# Altium PCB moteus_n1.PcbDoc (part 2 of 2)
Units mm, origin at the board's own origin, x right, y up, seen from the top; angles counter-clockwise.
Board outline 46 x 46 mm, 4 copper layers (Top, Route2, Route15, Bottom), stack 1.69 mm thick; 192 components, 104 nets, 644 pads, 479 vias.
Unrouted connection lines stored in the file: 50.
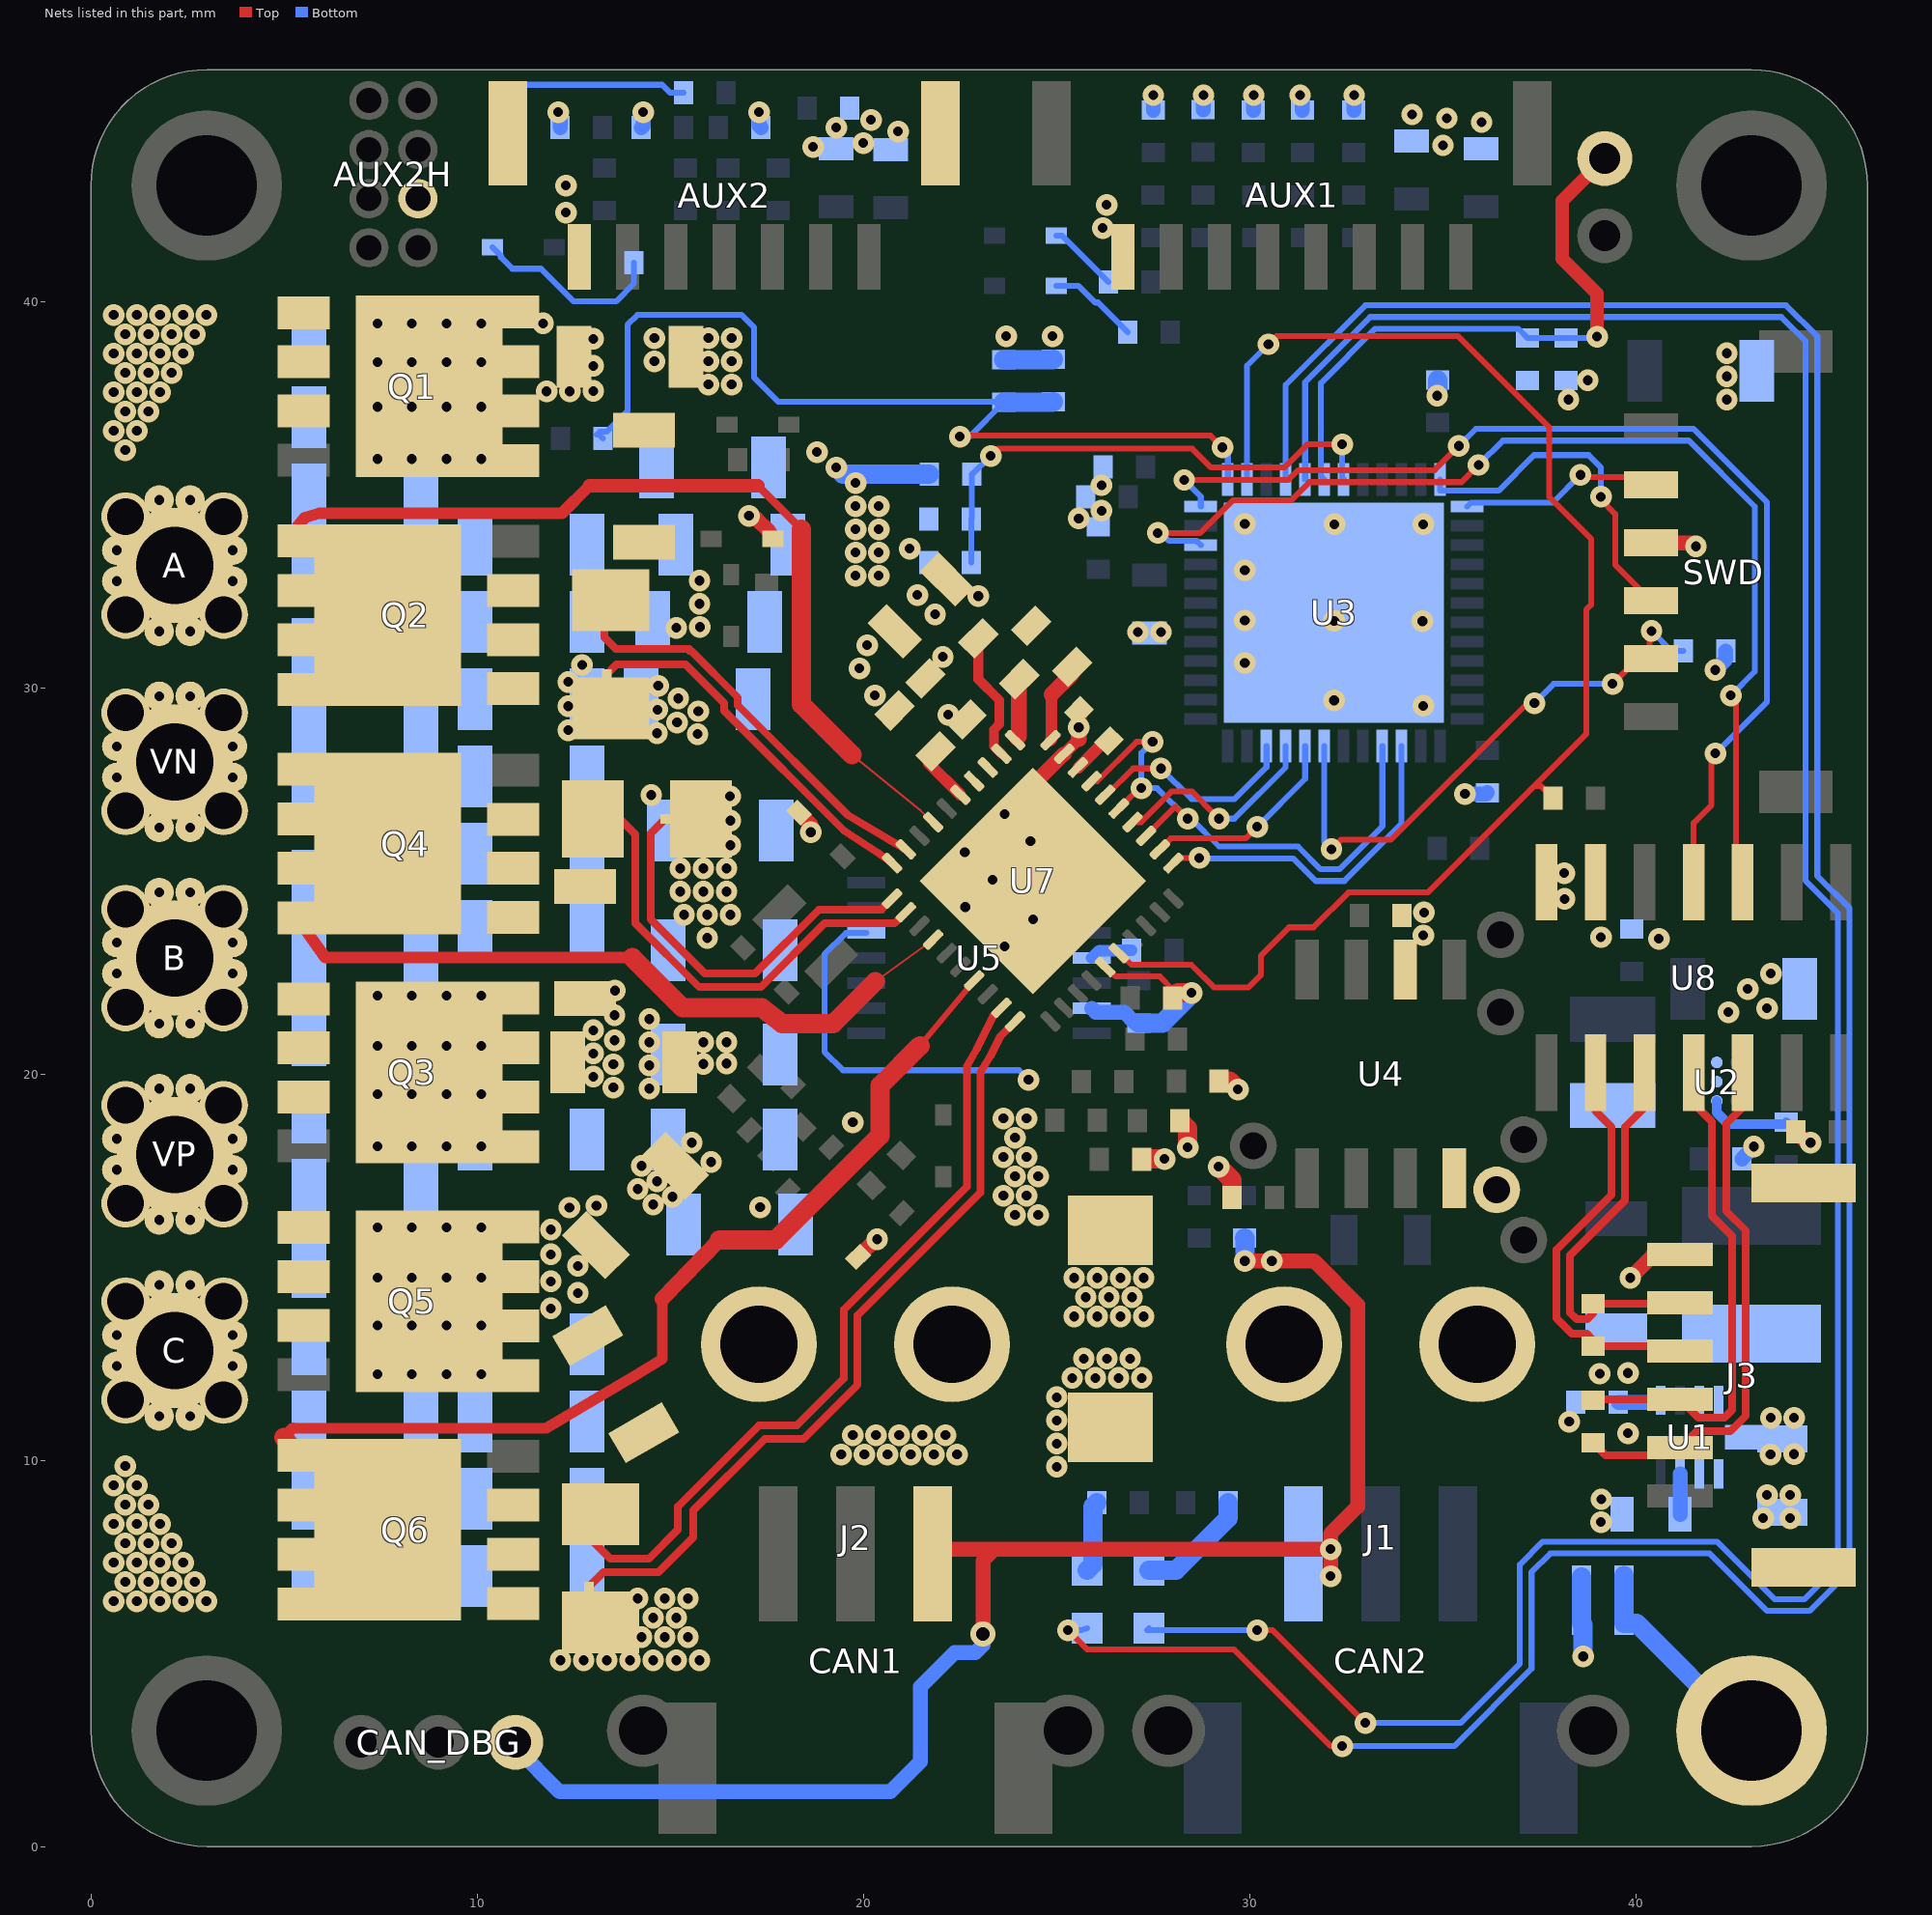
[diagram p4: the nets of this part, all layers, seen from the top]

## Via types
v1: diameter 0.559/0.559/0.559/0.559 (per signal layer), hole 0.254, Top to Bottom, 469 vias
v2: diameter 0.655/0.655/0.655/0.655 (per signal layer), hole 0.35, Top to Bottom, 10 vias

## Nets (pads, with @x,y where several pads share a name; then routed paths per layer and width w, separated by ;. In a path a pad name is that pad's centre, name@x,y a point inside that pad or via, vN(x,y) a via of type N, cw(c..) or ccw(c..) an arc to the next point about the centre after c; other vN are vias at no path point) (continued)
GND: AUX1.8 AUX2.7 AUX2H.P$6 C3.P$2 C4.P$2 C5.P$2 C6.P$2 C7.P$2 C8.P$2 C9.P$2 C10.P$2 C11.P$2 C12.P$2 C13.P$1 C14.P$2 C15.P$2 C16.P$2 C17.P$2 C18.P$2 C19.P$2 C20.P$2 C21.P$2 C22.P$2 C23.P$2 C23\.P$2 C24.P$2 C25.P$2 C26.P$2 C27.P$2 C28.P$2 C29.P$2 C30.P$2 C31.P$2 C32.P$2 C33.P$2 C34.P$2 C35.P$2 C36.P$2 C42.P$1 C87.P$2 CAN1.3 CAN2.3 CAN_DBG.3 DG1.P$1 J3.6 R3.P$1 R16.P$1 R18.P$2 R19.P$2 R38.P$1 SH4.2 SWD.4 U1.7 U2.B1 U2.B2 U3.49 U4.2 U4.8 U5.5 U5.13 U7.25 U8.6 U8.7 | length 67.9
  Top w0.152: U7.25@26.264,22.773 26.292,22.773 26.542,22.522 27.678,22.522 28.01,22.19 C42.P$1@28.01,21.96
  Top w0.384: CAN1.3@21.8,7.58 21.82,7.7 23.4,7.7 ; v2(23.1,5.5) 23.1,7.4 23.4,7.7 ; v1(29.88,15.16) v1(30.58,15.16) 31.668,15.16 32.8,14.028 32.8,8.8 32.1,8.1 v1(32.1,7.7) ; v1(32.1,7) v1(32.1,7.7) ; v1(39.86,14.72) 40.445,15.305 40.445,15.32 40.45,15.325 J3.6@41.15,15.325 ; SWD.4@40.4,33.75 41.47,33.75 v1(41.56,33.66) ; C30.P$2@44.15,18.5 44.43,18.22 v1(44.53,18.22) ; 23.4,7.7 v1(32.1,7.7)
  Top w0.5: C36.P$2@27.21,17.79 27.22,17.8 v1(27.8,17.8) ; C42.P$1@28.01,21.96 28.15,22.1 v1(28.5,22.1) ; C35.P$2@28.2,18.79 28.4,18.59 v1(28.4,18.1) ; v1(29.2,17.6) 29.55,17.25 C16.P$2@29.55,16.8 ; C34.P$2@29.21,19.81 29.49,19.81 v1(29.7,19.6)
  Bottom w0.152: U5.5@20.082,23.65 19.55,23.65 18.995,23.095 18.995,20.574 19.474,20.095 24.035,20.095 v1(24.28,19.85) ; v1(32.19,31.73) U3.49@32.19,31.94
  Bottom w0.384: CAN_DBG.3@11,2.7 11,2.561 12.14,1.421 20.7,1.421 21.479,2.2 21.479,4.14 22.36,5.021 22.9,5.021 23.1,5.221 v2(23.1,5.5) ; v1(12.1,44.9) 12.15,44.85 C19.P$2@12.15,44.5 ; C20.P$2@14.25,44.5 14.3,44.55 v1(14.3,44.9) ; v1(17.3,44.9) 17.3,44.55 C21.P$2@17.35,44.5 ; U5.13@25.918,21.7 26.018,21.6 26.76,21.6 27.04,21.32 C15.P$2@27.14,21.32 ; C25.P$2@27.51,44.95 v1(27.51,45.34) ; C26.P$2@28.8,44.96 28.8,45.33 v1(28.81,45.34) ; C27.P$2@30.1,44.95 30.1,45.33 v1(30.11,45.34) ; v1(31.31,45.34) 31.37,45.28 C28.P$2@31.37,44.95 ; C29.P$2@32.7,44.95 32.7,45.33 v1(32.71,45.34) ; v1(35.58,27.25) 36.13,27.25 C7.P$2@36.16,27.28 ; v1(42.06,30.46) 42.33,30.73 C9.P$2@42.33,30.95 ; C5.P$2@42.75,17.8 43.06,18.11 v1(43.06,18.12)
  Bottom w0.5: C32.P$2@23.64,38.49 24.91,38.49 R18.P$2@24.92,38.5 ; C15.P$2@27.14,21.32 27.75,21.32 28.5,22.07 v1(28.5,22.1) ; R3.P$1@29.87,15.75 29.88,15.74 v1(29.88,15.16) ; v1(34.86,37.56) 34.87,37.57 C8.P$2@34.87,37.97
  other v1: 39.1,8.4 39.11,8.99 39.8,10.7 38.28,11 39.07,12.24 39.8,12.26 42.4,21.6 43.4,21.7 42.9,22.2 43.5,22.6 40.6,23.5 39.1,23.54 34.5,23.59 34.52,24.18 38.16,24.53 38.15,25.2 34.5,29.53 32.19,29.67 29.88,30.64 27.11,31.44 27.71,31.44 34.48,31.72 29.88,31.74 29.88,33.04 21.2,33.6 29.88,34.24 32.2,34.23 34.5,34.23 25.58,34.38 26.17,34.58 26.17,35.24 38.26,37.46 42.36,37.46 38.76,37.96 42.36,38.06 42.36,38.66 23.7,39.1 24.9,39.1 26.2,41.9 12.3,42.3 26.3,42.5 12.3,43 18.7,44 35.01,44.04 20,44.1 20.9,44.4 19.3,44.5 36.01,44.64 20.2,44.7 35.11,44.74 34.21,44.84
LED1: D1.CATHODE U3.28 | length 76.3
  Top w0.152: v1(25.3,5.6) 25.8,5.1 29.6,5.1 32.1,2.6 v1(32.4,2.6)
  Bottom w0.152: v1(25.3,5.6) 25.65,5.6 D1.CATHODE@25.8,5.65 ; U3.28@30.94,35.39 30.94,37.84 33,39.9 43.896,39.9 44.705,39.091 44.705,25.126 45.539,24.292 45.539,7.139 44.5,6.1 43.4,6.1 41.913,7.587 37.787,7.587 37.305,7.105 37.305,4.605 35.3,2.6 v1(32.4,2.6)
LED2: D2.CATHODE U3.29 | length 71.9
  Top w0.152: v1(30.2,5.6) 30.6,5.6 v1(33,3.2)
  Bottom w0.152: D2.CATHODE@27.4,5.65 27.35,5.6 v1(30.2,5.6) ; U3.29@31.44,35.39 31.44,37.909 33.126,39.595 43.77,39.595 44.4,38.965 44.4,25 45.234,24.166 45.234,7.265 44.374,6.405 43.595,6.405 42.108,7.892 37.592,7.892 37,7.3 37,4.731 35.469,3.2 v1(33,3.2)
MOTOR1: U3.8 U7.32 | length 5.4
  Top w0.152: U7.32@27.678,25.813 27.965,26.1 29.9,26.1 v1(30.2,26.4)
  Bottom w0.152: v1(30.2,26.4) 31.44,27.64 U3.8@31.44,28.49
MOTOR2: U3.9 U7.34 | length 5.7
  Top w0.152: U7.34@26.971,26.52 27.194,26.52 27.99,27.316 28.51,27.316 28.808,27.018 28.808,27.011 v1(29.211,26.608)
  Bottom w0.152: v1(29.211,26.608) 29.608,26.608 30.94,27.94 U3.9@30.94,28.49
MOTOR3: U3.10 U7.36 | length 5.7
  Top w0.152: U7.36@26.264,27.227 26.309,27.227 26.99,27.908 v1(27.708,27.908)
  Bottom w0.152: v1(27.708,27.908) 28.5,27.116 29.614,27.116 30.44,27.942 U3.10@30.44,28.49
MOTOR_ENABLE: U3.3 U7.31 | length 8.8
  Top w0.152: U7.31@28.032,25.46 28.164,25.592 v1(28.7,25.592)
  Bottom w0.152: v1(28.7,25.592) 28.7,25.575 31.138,25.575 31.718,24.995 32.456,24.995 33.94,26.479 U3.3@33.94,28.49
MOTOR_FAULT: R26.P$2 U3.26 U7.26 | length 36.6
  Top w0.152: U7.26@26.617,23.126 26.646,23.126 26.945,22.827 28.495,22.827 29.087,22.235 29.966,22.235 30.3,22.569 30.3,23.069 31.026,23.795 31.657,23.795 32.562,24.7 34.62,24.7 37.37,27.45 ; v1(30.49,38.89) 30.7,39.1 35.4,39.1 37.757,36.743 37.757,34.943 38.845,33.855 38.845,32.145 38.72,32.019 38.72,28.8 37.37,27.45 ; R26.P$2@37.86,27.14 37.55,27.45 37.37,27.45
  Bottom w0.152: U3.26@29.94,35.39 29.94,38.34 v1(30.49,38.89)
MOTOR_HIZ: U3.4 U7.33 U7.35 U7.37 | length 15.3
  Top w0.152: U7.37@25.91,27.581 26.06,27.581 27.079,28.6 v1(27.49,28.6) ; U7.35@26.617,26.874 27.143,27.4 v1(27.2,27.4) ; U7.33@27.324,26.167 28.083,26.925 v1(28.4,26.608)
  Bottom w0.152: v1(27.49,28.6) 27.2,28.31 v1(27.2,27.4) 27.608,27.4 v1(28.4,26.608) 28.492,26.608 29.21,25.89 31.257,25.89 31.847,25.3 32.33,25.3 33.44,26.41 U3.4@33.44,28.49
N$1: C1.P$1 M3.P$1 R1.P$1 | length 5.7
  Bottom w0.5: R1.P$1@39.7,6.98 39.7,7.01 C1.P$1@39.7,5.78 40.02,5.78 42.8,3 M3.P$1@43,3
N$2: C40.P$2 U7.40 | length 2.1
  Top w0.254: C40.P$2@25.41,30.362 C40.P$2@25.41,30.54
  Top w0.305: U7.40@24.85,28.641 24.87,28.662 24.87,29.822
  Top w0.406: 24.87,29.822 C40.P$2@25.41,30.362
N$3: R40.P$1 U5.11 | length 1.1
  Bottom w0.305: U5.11@25.918,23 26.111,23.193 26.539,23.193 26.547,23.2 R40.P$1@26.95,23.2
N$4: C3.P$1 U1.3 | length 1
  Bottom w0.384: C3.P$1@41.15,8.6 U1.3@41.15,9.647
N$5: L2.2 U2.A1
N$10: C39.P$2 U7.1 | length 1.6
  Top w0.254: U7.1@23.93,28.641 24.03,28.742 ; C39.P$2@24.03,30.21 C39.P$2@24.04,30.22
  Top w0.406: 24.03,28.742 C39.P$2@24.03,30.21
N$13: C39.P$1 U7.2 | length 3.4
  Top w0.254: C39.P$1@22.98,31.28 22.98,30.22 23.524,29.676 23.524,29.055 23.384,28.914 23.384,28.481 U7.2@23.577,28.288
N$14: C38.P$2 U7.5 | length 1.5
  Top w0.152: C38.P$2@21.681,28.062 C38.P$2@21.87,28.35
  Top w0.3: C38.P$2@21.681,28.062 U7.5@22.516,27.227
N$16: C41.P$2 U7.38 | length 1.1
  Top w0.254: U7.38@25.557,27.934 U7.38@25.572,27.934 ; C41.P$2@26.259,28.621 C41.P$2@26.359,28.621
  Top w0.305: U7.38@25.572,27.934 C41.P$2@26.259,28.621
N$17: D1.ANODE R20.P$2 | length 1.9
  Bottom w0.5: D1.ANODE@25.8,7.15 25.95,7.3 25.95,8.8 R20.P$2@26.05,8.9
N$18: D2.ANODE R21.P$2 | length 3
  Bottom w0.5: D2.ANODE@27.4,7.15 28.1,7.15 29.45,8.5 R21.P$2@29.45,8.9
N$20: AUX2.S1
N$21: AUX2.S2
N$22: J3.S1
N$23: J3.S2
N$24: R38.P$2 U1.5 | length 1.1
  Bottom w0.384: R38.P$2@39.55,11.5 40.598,11.5 U1.5@40.65,11.552
N$25: D14.1 R34.P$1 | length 2.3
  Bottom w0.152: D14.1@25,40.4 25.577,40.4 26.005,39.971 26.079,39.971 R34.P$1@26.85,39.2
N$26: R39.P$1 U2.B3 | length 2.2
  Bottom w0.254: U2.B3@42.1,19.3 42.1,19 42.4,18.7 43.85,18.7 R39.P$1@43.9,18.75
N$27: D13.1 R33.P$1 | length 1.8
  Bottom w0.152: D13.1@25,41.7 25.15,41.7 R33.P$1@26.35,40.5
N$28: D15.1 R6.P$1 | length 4.7
  Bottom w0.152: D15.1@10.8,45.4 11.008,45.608 14.792,45.608 15,45.4 R6.P$1@15.35,45.4
N$29: D16.1 R7.P$1 | length 5
  Bottom w0.152: D16.1@10.4,41.4 10.617,41.183 10.617,41.144 10.915,40.846 11.654,40.846 12.5,40 13.6,40 14.06,40.46 R7.P$1@14.06,41
NRST: C9.P$1 SWD.2 U3.7 | length 14.9
  Top w0.152: v1(32.121,25.819) 32.362,26.06 33.657,26.06 37.197,29.6 v1(37.377,29.6) ; v1(39.4,30.1) 40.05,30.75 SWD.2@40.4,30.75 40.36,30.79 40.36,31.418 v1(40.41,31.468)
  Bottom w0.152: U3.7@31.94,28.49 31.94,26 v1(32.121,25.819) ; v1(37.377,29.6) 37.877,30.1 v1(39.4,30.1) ; v1(40.41,31.468) 40.929,30.95 C9.P$1@41.23,30.95
RS422_A: J3.2 R35.P$2 U8.12 | length 13.8
  Top w0.2: R35.P$2@38.9,10.45 39.225,10.125 40.95,10.125 J3.2@41.15,10.325 41.573,10.748 42.446,10.748 42.852,11.154 42.852,15.946 42.35,16.448 42.35,18.716 42.77,19.136 U8.12@42.77,20.036
RS422_B: J3.3 R35.P$1 U8.11 | length 13
  Top w0.2: R35.P$1@38.9,11.55 38.925,11.575 J3.3@41.15,11.575 41.625,11.1 42.3,11.1 42.5,11.3 42.5,15.8 41.97,16.33 41.97,18.766 41.5,19.236 U8.11@41.5,20.036
RS422_DE: U3.24 U8.4 | length 27.9
  Top w0.152: v1(28.309,35.378) 31.009,35.378 31.26,35.63 34.79,35.63 v1(35.419,36.259) ; U8.4@41.5,24.964 41.5,26.5 41.963,26.963 41.963,28.2 v1(42.063,28.3)
  Bottom w0.152: v1(28.309,35.378) 28.74,34.947 U3.24@28.74,34.69 ; v1(35.419,36.259) 35.86,36.7 41.5,36.7 43.4,34.8 43.4,29.637 v1(42.063,28.3)
RS422_RE: U3.22 U8.3 | length 28.5
  Top w0.152: v1(27.625,34.005) 28.725,34.005 29.57,34.851 31.081,34.851 31.551,35.32 35.486,35.32 v1(35.932,35.766) ; v1(42.463,29.8) 42.6,29.663 42.6,25.134 U8.3@42.77,24.964
  Bottom w0.152: v1(27.625,34.005) 27.715,34.005 27.921,33.8 28.63,33.8 U3.22@28.74,33.69 ; v1(35.932,35.766) 36.561,36.395 41.374,36.395 43.084,34.684 43.084,30.421 v1(42.463,29.8)
RS422_Y: J3.4 R36.P$2 U8.9 | length 10.8
  Top w0.2: U8.9@38.96,20.036 38.96,19.04 39.37,18.63 39.37,16.87 37.948,15.448 37.948,13.674 38.344,13.278 38.732,13.278 38.9,13.11 R36.P$2@38.9,12.95 41.025,12.95 J3.4@41.15,12.825
RS422_Z: J3.5 R36.P$1 U8.10 | length 10.3
  Top w0.2: U8.10@40.23,20.036 40.23,19.13 39.722,18.623 39.722,16.724 38.3,15.302 38.3,13.82 38.47,13.65 38.75,13.65 38.9,13.8 R36.P$1@38.9,14.05 41.125,14.05 J3.5@41.15,14.075
SHA: A.1 A.2 A.3 A.4 A.5 A.6 A.7 A.8 A.9 A.10 A.11 A.12 A.13 Q1.1 Q1.2 Q1.3 Q2.5 Q2.6 Q2.7 Q2.8 Q2.PAD U7.7 | length 25.9
  Top w0.05: 19.705,28.265 21.49,26.813 U7.7@21.809,26.52
  Top w0.2: 17.275,35.225 18.4,34.1
  Top w0.3: Q2.5@5.34,33.805 5.312,34.127 5.528,34.393 5.911,34.515 12.198,34.515 12.908,35.225
  Top w0.35: 12.908,35.225 17.275,35.225
  Top w0.5: Q2.6@5.34,32.518 7.39,31.937 Q2.PAD@7.69,31.88 ; 18.4,34.1 18.4,29.57 19.705,28.265
SHB: B.1 B.2 B.3 B.4 B.5 B.6 B.7 B.8 B.9 B.10 B.11 B.12 B.13 Q3.1 Q3.2 Q3.3 Q4.5 Q4.6 Q4.7 Q4.8 Q4.PAD U7.14 | length 21.3
  Top w0.05: 20.311,22.389 U7.14@21.809,23.48
  Top w0.3: Q4.8@5.34,24.035 6.074,23.01 14.021,23.01
  Top w0.5: Q4.6@5.34,26.598 7.39,26.637 Q4.PAD@7.69,25.96 ; 14.021,23.01 15.321,21.71 17.37,21.71 17.9,21.3 19.223,21.3 20.311,22.389
SHC: C.1 C.2 C.3 C.4 C.5 C.6 C.7 C.8 C.9 C.10 C.11 C.12 C.13 Q5.1 Q5.2 Q5.3 Q6.5 Q6.6 Q6.7 Q6.8 Q6.PAD U7.17 | length 27.8
  Top w0.152: 21.469,20.731 U7.17@22.87,22.419
  Top w0.28: 5.23,10.83 11.789,10.83 14.035,12.156 14.795,12.626 14.795,14.178
  Top w0.3: 4.995,10.595 5.23,10.83
  Top w0.4: 14.795,14.178 16.273,15.7
  Top w0.5: 4.995,10.595 Q6.5@5.34,10.125 ; Q6.6@5.34,8.837 7.39,9.038 Q6.PAD@7.69,8.2 ; 16.273,15.7 17.73,15.7 20.437,18.407 20.437,19.699 21.469,20.731
SWCLK: SWD.5 U3.37 | length 5.2
  Top w0.152: v1(38.57,35.51) 38.63,35.45 40.2,35.45 SWD.5@40.4,35.25
  Bottom w0.152: U3.37@35.64,34.69 35.74,34.79 37.85,34.79 v1(38.57,35.51)
SWDIO: SWD.3 U3.36 | length 9
  Top w0.152: v1(39.1,34.942) 39.1,34.87 39.47,34.5 39.47,33.18 SWD.3@40.4,32.25
  Bottom w0.152: U3.36@34.94,35.39 34.94,35.1 36.45,35.1 37.37,36.02 38.78,36.02 39.1,35.7 v1(39.1,34.942)
SXA_N: SH1.1 U7.10 | length 9.6
  Top w0.2: SH1.1@13.36,30.347 13.613,30.6 15.4,30.6 16.4,29.6 16.4,29.4 19.503,26.297 20.403,25.711 U7.10@20.748,25.46
SXA_P: C44.P$2 Q2.1 Q2.2 Q2.3 RA.2 U7.9 | length 11.2
  Top w0.2: RA.2@13.46,32.27 13.3,32.21 13.3,31.3 13.6,31 15.498,31 15.498,30.952 15.546,30.952 16.752,29.746 16.752,29.546 19.598,26.7 20.69,26.055 U7.9@21.102,25.813
SXB_N: SH2.1 U7.11 | length 10.4
  Top w0.2: SH2.1@14.873,26.6 14.5,26.227 14.5,24 15.9,22.6 17.2,22.6 18.852,24.252 20.46,24.252 U7.11@20.749,24.54
SXB_P: C45.P$2 Q4.1 Q4.2 Q4.3 RB.2 U7.12 | length 12.1
  Top w0.2: RB.2@13,26.6 13.7,26.6 14.1,26.2 14.1,23.902 15.754,22.248 17.346,22.248 18.998,23.9 20.815,23.9 U7.12@21.102,24.187
SXC_N: SH3.1 U7.20 | length 20.5
  Top w0.2: SH3.1@12.9,6.727 13.273,7.1 14.7,7.1 15.6,8 15.6,8.7 17.448,10.548 18.446,10.548 19.852,11.954 19.852,13.752 23.032,16.932 23.032,20.044 23.278,20.442 23.552,20.98 U7.20@23.93,21.358
SXC_P: C46.P$2 Q6.1 Q6.2 Q6.3 RC.2 U7.19 | length 20.9
  Top w0.2: RC.2@13.2,8.6 12.9,8 13.448,7.452 14.452,7.452 15.2,8.2 15.2,8.798 17.302,10.9 18.28,10.9 19.5,12.12 19.5,13.898 22.68,17.078 22.68,20.205 22.942,20.65 23.365,21.5 U7.19@23.577,21.712
V+: C2.P$1 C37.P$1 C38.P$1 C43.P$1 C44.P$1 C45.P$1 C46.P$1 C47.P$1 C48.P$1 C49.P$1 C50.P$1 C51.P$1 C52.P$1 C53.P$1 C54.P$1 C55.P$1 C56.P$1 C57.P$1 C58.P$1 C59.P$1 C60.P$1 C61.P$1 C62.P$1 C63.P$1 C64.P$1 C65.P$1 C66.P$1 C67.P$1 C68.P$1 C69.P$1 C70.P$1 C71.P$1 C72.P$1 C73.P$1 C74.P$1 C75.P$1 C76.P$1 C77.P$1 C78.P$1 C79.P$1 C80.P$1 C81.P$1 C82.P$1 C83.P$1 C84.P$1 C85.P$1 C86.P$1 D12.C J1.1 J2.1 Q1.5 Q1.6 Q1.7 Q1.8 Q1.PAD Q3.5 Q3.6 Q3.7 Q3.8 Q3.PAD Q5.5 Q5.6 Q5.7 Q5.8 Q5.PAD R15.P$2 U1.1 U1.2 U7.3 U7.4 VP.1 VP.2 VP.3 VP.4 VP.5 VP.6 VP.7 VP.8 VP.9 VP.10 VP.11 VP.12 VP.13 | length 28.5
  Top w0.5: v1(8.31,20.73) 8.31,20.296 Q3.PAD@8.76,20.04 ; v1(8.31,37.27) 8.489,37.797 Q1.PAD@8.76,37.8 ; v1(9.21,12.23) 8.57,13.753 Q5.PAD@8.76,14.12 ; v1(10.11,12.23) 10.257,12.278 Q5.5@11.11,12.195 ; v1(10.11,18.13) 10.292,18.36 Q3.5@11.11,18.115 ; v1(10.11,19.48) 10.253,19.661 Q3.6@11.11,19.403 ; v1(10.11,20.73) 10.01,20.83 10.01,21.017 Q3.7@11.11,20.678 ; v1(10.11,22.03) 10.01,22.03 10.01,22.035 10.096,22.005 Q3.8@11.11,21.965 ; v1(10.11,35.92) 10.353,36.011 Q1.5@11.11,35.875 ; v1(10.11,37.27) 10.161,37.318 Q1.6@11.11,37.162 ; v1(10.11,38.43) 10.386,38.548 Q1.7@11.11,38.438 ; v1(10.11,39.43) 10.509,39.811 Q1.8@11.11,39.725 ; Q5.6@11.11,13.483 10.859,13.49 v1(9.21,13.49) 9.21,15.362 Q5.PAD@8.76,14.12 ; Q5.7@11.11,14.758 Q5.PAD@8.76,14.12 ; Q5.8@11.11,16.045 8.949,15.925 8.567,15.965 8.56,15.935 Q5.PAD@8.76,14.12
  Bottom w0.5: v1(19.3,35.7) 19.47,35.53 R15.P$2@21.71,35.53
  other v1: 43.3,8.5 44,8.5 43.4,9.1 44,9.1 25.01,9.83 19.43,10.15 20.03,10.15 20.63,10.15 21.23,10.15 21.83,10.15 22.43,10.15 25.01,10.43 19.73,10.65 20.33,10.65 20.93,10.65 21.53,10.65 22.13,10.65 25.01,11.03 25.01,11.63 25.41,12.13 26.01,12.13 26.61,12.13 27.21,12.13 7.425,12.23 8.31,12.23 25.71,12.63 26.31,12.63 26.91,12.63 7.425,13.49 8.31,13.49 10.11,13.49 11.91,13.93 12.61,14.33 11.91,14.63 7.425,14.73 8.31,14.73 9.21,14.73 10.11,14.73 12.61,15.03 11.91,15.33 11.91,15.97 7.425,16.03 8.31,16.03 9.21,16.03 10.11,16.03 23.93,16.35 24.53,16.35 12.39,16.54 17.33,16.55 13.09,16.59 23.63,16.85 24.23,16.85 23.93,17.35 24.53,17.35 23.63,17.85 24.23,17.85 7.425,18.13 8.31,18.13 9.21,18.13 23.93,18.35 19.73,18.75 23.63,18.85 24.23,18.85 7.425,19.48 8.31,19.48 9.21,19.48 13.53,19.65 13.01,19.93 13.53,20.25 13.01,20.53 7.425,20.73 9.21,20.73 13.56,20.87 13.01,21.13 13.56,21.52 7.425,22.03 8.31,22.03 9.21,22.03 13.57,22.16 22.2,29.3 20.3,29.8 19.9,30.5 20.1,31.1 19.8,32.9 20.4,32.9 19.8,33.5 20.4,33.5 19.8,34.1 20.4,34.1 19.8,34.7 20.4,34.7 19.8,35.3 7.425,35.92 8.31,35.92 9.21,35.92 18.8,36.1 7.425,37.27 9.21,37.27 11.8,37.67 12.4,37.67 13.01,37.68 13.01,38.33 7.425,38.43 8.31,38.43 9.21,38.43 13.01,39.03 7.425,39.43 8.31,39.43 9.21,39.43 11.71,39.43
V-: C1.P$2 C2.P$2 C37.P$2 C40.P$1 C41.P$1 C43.P$2 C47.P$2 C48.P$2 C49.P$2 C50.P$2 C51.P$2 C52.P$2 C53.P$2 C54.P$2 C55.P$2 C56.P$2 C57.P$2 C58.P$2 C59.P$2 C60.P$2 C61.P$2 C62.P$2 C63.P$2 C64.P$2 C65.P$2 C66.P$2 C67.P$2 C68.P$2 C69.P$2 C70.P$2 C71.P$2 C72.P$2 C73.P$2 C74.P$2 C75.P$2 C76.P$2 C77.P$2 C78.P$2 C79.P$2 C80.P$2 C81.P$2 C82.P$2 C83.P$2 C84.P$2 C85.P$2 C86.P$2 D4.2 D7.2 D10.2 D12.A J1.2 J2.2 R1.P$2 RA.1 RB.1 RC.1 SH1.2 SH2.2 SH3.2 SH4.1 U7.39 U7.PAD VN.1 VN.2 VN.3 VN.4 VN.5 VN.6 VN.7 VN.8 VN.9 VN.10 VN.11 VN.12 VN.13 | length 10.1
  Top w0.152: SH1.2@13.36,30.093 RA.1@13.46,29.47
  Top w0.25: v1(23.66,26.73) U7.PAD@23.66,26.745 ; v1(24.33,26.03) 24.33,25.06 U7.PAD@24.39,25
  Top w0.305: U7.39@25.203,28.288 25.581,28.666
  Top w0.384: SH2.2@15.127,26.6 RB.1@15.8,26.6 ; v1(17.04,34.45) 17.12,34.37 17.24,34.37 17.56,34.05 D4.2@17.66,33.85 ; D7.2@18.334,26.766 18.64,26.46 v1(18.64,26.26) ; D10.2@19.864,15.264 20.32,15.72 v1(20.36,15.72) ; U7.PAD@23.66,26.745 U7.39@25.203,28.288
  Top w0.406: 25.581,28.666 C41.P$1@25.581,29.399
  Bottom w0.5: R1.P$2@38.6,6.98 C1.P$2@38.6,5.78 38.64,5.74 v1(38.64,4.92)
  other v1: 12.16,4.82 12.76,4.82 13.36,4.82 13.96,4.82 14.56,4.82 15.16,4.82 15.76,4.82 14.26,5.42 14.86,5.42 15.46,5.42 14.56,5.92 15.16,5.92 0.59,6.35 1.19,6.35 1.79,6.35 2.39,6.35 2.99,6.35 14.16,6.42 14.86,6.42 15.46,6.42 0.89,6.85 1.49,6.85 2.09,6.85 2.69,6.85 0.59,7.35 1.19,7.35 1.79,7.35 2.39,7.35 0.89,7.85 1.49,7.85 2.09,7.85 0.59,8.35 1.19,8.35 1.79,8.35 0.89,8.85 1.49,8.85 0.59,9.35 1.19,9.35 0.89,9.85 43.49,10.15 44.1,10.16 43.5,11.1 44.1,11.1 25.46,13.72 26.06,13.72 26.66,13.72 27.26,13.72 25.76,14.22 26.36,14.22 26.96,14.22 25.46,14.72 26.06,14.72 26.66,14.72 27.26,14.72 14.56,16.62 15.06,16.82 14.16,17.02 14.66,17.22 14.26,17.62 16.06,17.72 15.56,18.22 14.46,19.62 14.46,20.22 15.86,20.26 16.46,20.27 14.46,20.82 15.86,20.82 16.46,20.82 14.46,21.42 23.66,23.3 15.96,23.52 24.4,24 15.36,24.12 15.96,24.12 16.56,24.12 22.64,24.32 15.26,24.72 15.86,24.72 16.46,24.72 23.35,25.03 15.26,25.32 15.86,25.32 16.46,25.32 22.63,25.74 16.56,25.92 16.56,26.56 16.55,27.19 14.51,27.22 15.71,28.8 14.66,28.82 12.36,28.9 25.58,28.97 15.18,29.1 15.73,29.39 14.67,29.43 12.36,29.52 15.21,29.72 14.69,30.05 12.36,30.15 12.72,30.59 22.06,30.8 15.16,31.55 15.77,31.57 21.86,31.9 15.76,32.17 22.98,32.37 21.4,32.4 15.76,32.77 0.89,36.15 0.59,36.65 1.19,36.65 0.89,37.15 1.49,37.15 0.59,37.65 1.19,37.65 1.79,37.65 15.99,37.85 16.59,37.85 0.89,38.15 1.49,38.15 2.09,38.15 14.59,38.45 15.99,38.45 16.59,38.45 0.59,38.65 1.19,38.65 1.79,38.65 2.39,38.65 14.59,39.05 15.99,39.05 16.59,39.05 0.89,39.15 1.49,39.15 2.09,39.15 2.69,39.15 0.59,39.65 1.19,39.65 1.79,39.65 2.39,39.65 2.99,39.65
VBAT_SENSE: C31.P$1 R15.P$1 R16.P$2 U3.31 | length 13.5
  Top w0.152: v1(23.3,36) 23.487,36.187 28.519,36.187 29.006,35.7 30.899,35.7 31.499,36.3 v1(32.4,36.3)
  Bottom w0.152: C31.P$1@22.8,33.24 R16.P$2@22.8,34.37 22.81,34.38 R15.P$1@22.81,35.53 22.83,35.53 v1(23.3,36) ; v1(32.4,36.3) 32.4,35.43 U3.31@32.44,35.39
VSW: L1.2 U1.8
VTEMP_FET: C32.P$1 R17.P$2 R18.P$1 U3.25 | length 25.6
  Top w0.152: v1(22.5,36.5) 22.526,36.526 28.997,36.526 v1(29.3,36.223)
  Bottom w0.152: R17.P$2@13.26,36.45 13.16,36.55 13.102,36.55 13.177,36.625 13.356,36.625 13.893,37.162 13.893,39.393 14.15,39.65 16.85,39.65 17.17,39.33 17.17,38.03 17.8,37.4 23.63,37.4 C32.P$1@23.64,37.39 22.75,36.5 v1(22.5,36.5) ; v1(29.3,36.223) 29.44,36.083 U3.25@29.44,35.39
  Bottom w0.5: C32.P$1@23.64,37.39 24.91,37.39 R18.P$1@24.92,37.4
VTEMP_MOT: C33.P$1 R19.P$1 TEMP.2 U3.30 | length 15.8
  Top w0.348: v1(39,39.087) 39,40.2 38.1,41.1 38.1,42.6 TEMP.2@39.2,43.7
  Bottom w0.152: U3.30@31.94,35.39 31.85,35.48 31.85,37.888 33.252,39.29 36.96,39.29 C33.P$1@37.2,39.05 R19.P$1@38.2,39.05 38.963,39.05 v1(39,39.087)
pads on no net: AUX1.SH1 AUX1.SH2 CAN1.S1 CAN1.S2 CAN2.S1 CAN2.S2 J1.M1 J1.M2 J2.M1 J2.M2 M1.P$1 M2.P$1 M4.P$1 SWD.1 SWD.P1 SWD.P2 U1.6 U2.C1 U2.C3 U5.6 U5.7 U5.8 U5.9 U5.10 U5.14 U8.1 U8.8

## Polygon pours and split planes (outlines as drawn)
V- on Route15 "Polygon_2_Net_V-" (solid, remove dead copper, pour order 100): 0.448,40.127 6.527,40.127 6.527,26.073 0.273,26.073 0.273,39.953
V+ on Route15 "Polygon_1_Net_V+" (solid, remove dead copper, pour order 110): 0.308,41.592 26.392,41.592 26.392,17.78 28.98,15.192 45.692,15.192 45.692,3.92 42.079,0.308 3.92,0.308 0.308,3.92
+3V3 on Route15 "Polygon_9_Net_+3V3" (solid, remove dead copper, pour order 81): 21.725,39.925 21.01,39.925 20.318,40.618 20.125,40.81 20.125,42.425 18.09,42.425 17.775,42.11 17.775,39.59 18.39,38.975 20.79,38.975 21.49,38.275 21.725,38.275
+3V3 on Route15 "Polygon_2_Net_+3V3" (solid, remove dead copper, pour order 86): 21.236,42.363 23.963,42.363 23.963,37.387 21.236,37.387
+3V3 on Route15 "Polygon_1_Net_+3V3" (solid, remove dead copper, pour order 102): 5.808,45.692 41.98,45.692 45.48,42.192 45.692,42.192 45.692,15.708 29.721,15.708 26.508,18.92 26.508,41.908 5.808,41.908
N$5 on Bottom "Polygon_1_Net_N$5" (solid, remove dead copper, pour order 41): 41.776,20.154 41.462,20.154 40.776,19.469 40.776,18.624 39.624,18.624 39.624,19.532 40.768,20.676 41.632,20.676 41.776,20.532
VSW on Bottom "Polygon_1_Net_VSW" (solid, remove dead copper, pour order 40): 41.949,11.149 42.221,11.149 42.636,11.564 42.821,11.749 43.421,11.749 44.423,12.751 41.949,12.751
+5V on Bottom "Polygon_6_Net_+5V" (solid, remove dead copper, pour order 69): 42.776,16.832 41.776,17.832 41.776,19.976 41.569,19.976 41.024,19.432 41.024,18.232 39.324,16.532 39.324,16.224 42.776,16.224
+5V on Bottom "Polygon_5_Net_+5V" (solid, remove dead copper, pour order 88): 44.751,16.951 37.679,16.951 36.849,16.121 36.849,15.979 38.3,14.528 38.821,15.049 44.751,15.049
+5V on Bottom "Polygon_4_Net_+5V" (solid, remove dead copper, pour order 53): 21.725,42.825 20.49,42.825 20.375,42.71 20.375,40.075 21.725,40.075
+5V on Bottom "Polygon_1_Net_+5V" (solid, remove dead copper, pour order 46): 35.737,42.564 37.864,42.564 37.864,41.137 35.737,41.137
V- on Bottom "Polygon_19_Net_V-" (solid, remove dead copper, pour order 38): 44.451,11.451 43.049,11.451 43.049,9.849 44.451,9.849
V- on Bottom "Polygon_17_Net_V-" (solid, remove dead copper, pour order 105): 20.775,13.61 22.69,15.525 31.01,15.525 32.925,13.61 32.925,12.29 32.11,11.475 21.39,11.475 20.775,12.09
V- on Bottom "Polygon_15_Net_V-" (solid, remove dead copper, pour order 108): 14.71,36.525 13.89,36.525 12.175,34.81 12.175,34.31 11.675,33.81 11.675,6.075 16.61,6.075 16.925,6.39 16.925,8.71 14.825,10.81 14.825,13.49 16.025,14.69 16.025,17.01 15.925,17.11 15.925,35.31
V- on Bottom "Polygon_14_Net_V-" (solid, remove dead copper, pour order 91): 6.425,10.225 0.275,10.225 0.275,6.075 6.425,6.075
V- on Bottom "Polygon_13_Net_V-" (solid, remove dead copper, pour order 90): 6.525,40.025 0.275,40.025 0.275,35.975 6.525,35.975
V- on Bottom "Polygon_12_Net_V-" (solid, remove dead copper, pour order 92): 5.91,30.325 0.275,30.325 0.275,25.89 0.39,25.775 6.125,25.775 6.125,30.11
V- on Bottom "Polygon_11_Net_V-" (solid, remove dead copper, pour order 98): 6.625,40.325 4.875,40.325 4.875,5.89 4.99,5.775 6.625,5.775
V+ on Bottom "Polygon_15_Net_V+" (solid, remove dead copper, pour order 50): 44.351,9.451 43.021,9.451 42.521,9.951 41.549,9.951 41.549,9.249 41.779,9.249 42.879,8.149 44.351,8.149
V+ on Bottom "Polygon_14_Net_V+" (solid, remove dead copper, pour order 70): 27.625,10.775 27.625,12.61 27.31,12.925 25.59,12.925 25.282,12.618 24.675,12.01 24.675,11 24.675,10.64 24.81,10.775
V+ on Bottom "Polygon_13_Net_V+" (solid, remove dead copper, pour order 113): 37.525,14.625 34.79,14.625 33.375,13.21 33.375,12.61 31.99,11.225 20.575,11.225 20.575,8.275 32.11,8.275 34.01,10.175 37.525,10.175
V+ on Bottom "Polygon_12_Net_V+" (solid, remove dead copper, pour order 114): 21.3,16.635 21.09,16.425 16.575,16.425 16.575,14.91 15.275,13.61 15.275,4.71 15.14,4.575 22.625,4.575 22.625,15.31
V+ on Bottom "Polygon_11_Net_V+" (solid, remove dead copper, pour order 99): 10.911,6.725 7.675,6.725 7.675,0.475 22.625,0.475 22.625,5.31 22.51,5.425 12.061,5.395
V+ on Bottom "Polygon_9_Net_V+" (solid, remove dead copper, pour order 111): 18.375,19.325 25.025,19.325 25.025,15.075 18.375,15.075
V+ on Bottom "Polygon_8_Net_V+" (solid, remove dead copper, pour order 87): 17.59,36.625 19.11,36.625 20.518,35.218 20.625,35.11 20.625,32.49 19.91,31.775 17.475,31.775 17.475,36.51
V+ on Bottom "Polygon_6_Net_V+" (solid, remove dead copper, pour order 97): 18.41,36.825 16.375,36.825 16.375,15.79 17.19,14.975 19.225,14.975 19.225,20.51 18.325,21.41 18.325,22.1 18.325,24.89 18.625,25.19 18.625,36.61
V+ on Bottom "Polygon_5_Net_V+" (solid, remove dead copper, pour order 107): 10.51,40.325 7.675,40.325 7.675,6.09 7.79,5.975 10.725,5.975 10.725,40.11
GND on Bottom "Polygon_25_Net_GND" (solid, remove dead copper, pour order 26): 39.951,9.121 39.721,9.351 38.749,9.351 38.749,8.149 39.951,8.149
GND on Bottom "Polygon_24_Net_GND" (solid, remove dead copper, pour order 19): 28.051,31.521 27.821,31.751 27.6,31.751 26.879,31.751 26.749,31.621 26.749,31.049 27.7,31.049 27.921,31.049 28.051,31.179
GND on Bottom "Polygon_23_Net_GND" (solid, remove dead copper, pour order 29): 40.876,24.076 38.824,24.076 38.824,23.224 40.876,23.224
GND on Bottom "Polygon_22_Net_GND" (solid, remove dead copper, pour order 65): 44.676,23.076 43.368,23.076 42.124,21.832 42.124,21.332 41.924,21.132 41.924,20.868 41.934,20.858 41.934,19.624 42.276,19.624 42.276,20.469 43.132,21.324 44.676,21.324
GND on Bottom "Polygon_21_Net_GND" (solid, remove dead copper, pour order 71): 42.751,10.851 42.021,10.851 41.751,11.121 41.751,12.351 41.121,12.351 40.421,13.051 38.849,13.051 38.849,12.049 41.279,12.049 41.449,11.879 41.449,11.121 41.179,10.851 39.321,10.851 38.521,11.651 38.149,11.651 38.149,10.249 42.621,10.249 42.751,10.379
GND on Bottom "Polygon_20_Net_GND" (solid, remove dead copper, pour order 33): 26.451,35.951 26.179,35.951 25.249,35.021 25.249,33.949 26.321,33.949 26.451,34.079
GND on Bottom "Polygon_16_Net_GND" (solid, remove dead copper, pour order 42): 30.875,8.725 32.225,8.725 32.225,6.675 30.875,6.675
GND on Bottom "Polygon_12_Net_GND" (solid, remove dead copper, pour order 37): 41.975,39.025 43.01,39.025 43.125,38.91 43.125,37.075 42.09,37.075 41.975,37.19
GND on Bottom "Polygon_11_Net_GND" (solid, remove dead copper, pour order 35): 36.875,38.225 39.025,38.225 39.025,37.79 38.518,37.282 38.41,37.175 37.19,37.175 36.875,37.49
GND on Bottom "Polygon_10_Net_GND" (solid, remove dead copper, pour order 34): 23.39,39.525 25.11,39.525 25.225,39.41 25.225,38.475 23.49,38.475 23.275,38.69 23.275,39 23.275,39.41
GND on Bottom "Polygon_9_Net_GND" (solid, remove dead copper, pour order 27): 20.975,34.725 21.81,34.725 21.925,34.61 21.925,32.975 20.975,32.975
GND on Bottom "Polygon_4_Net_GND" (solid, remove dead copper, pour order 66): 33.837,45.163 36.964,45.163 36.964,43.636 33.837,43.636
GND on Bottom "Polygon_2_Net_GND" (solid, remove dead copper, pour order 73): 18.337,45.763 21.264,45.763 21.264,43.636 18.337,43.636
+3V3 on Bottom "Polygon_12_Net_+3V3" (solid, remove dead copper, pour order 25): 28.951,32.951 28.2,32.951 28.111,32.951 27.941,33.121 26.949,33.121 26.849,33.021 26.849,32.579 26.979,32.449 28.2,32.449 28.951,32.449
+3V3 on Bottom "Polygon_11_Net_+3V3" (solid, remove dead copper, pour order 75): 41.876,22.976 38.968,22.976 38.324,22.331 38.324,20.824 40.432,20.824 41.031,21.424 41.876,21.424
+3V3 on Bottom "Polygon_10_Net_+3V3" (solid, remove dead copper, pour order 32): 27.851,35.951 27.079,35.951 26.749,35.621 26.749,35.321 26.649,35.221 26.649,33.949 27.151,33.949 27.151,34.079 27.851,34.779
+3V3 on Bottom "Polygon_8_Net_+3V3" (solid, remove dead copper, pour order 43): 40.075,39.125 41.525,39.125 41.525,37.075 40.59,37.075 40.075,37.59
+3V3 on Bottom "Polygon_6_Net_+3V3" (solid, remove dead copper, pour order 49): 33.675,43.025 34.925,43.025 34.925,40.375 33.89,40.375 33.675,40.59
+3V3 on Bottom "Polygon_3_Net_+3V3" (solid, remove dead copper, pour order 44): 18.675,43.325 19.925,43.325 19.925,42.69 19.625,42.39 19.625,40.275 19.39,40.275 18.782,40.882 18.675,40.99
GHC_D on Top "Polygon_1_Net_GHC_D" (solid, remove dead copper, pour order 0): 10.641,11.449 11.486,11.449 11.472,11.195 10.563,11.195
+5V on Top "Polygon_3_Net_+5V" (solid, remove dead copper, pour order 55): 21.725,42.125 19.875,42.125 19.875,40.19 19.99,40.075 21.725,40.075
+5V on Top "Polygon_2_Net_+5V" (solid, remove dead copper, pour order 61): 37.725,42.625 35.275,42.625 35.275,40.775 37.31,40.775 37.725,41.19
SXC_P on Top "Polygon_1_Net_SXC_P" (solid, remove dead copper, pour order 79): 14.789,11.083 15.063,10.65 14.225,10.202 14.225,9.49 10.81,6.075 10.275,6.075 10.275,9.325 11.86,9.325
SXB_P on Top "Polygon_1_Net_SXB_P" (solid, remove dead copper, pour order 77): 10.275,27.025 12.825,27.025 12.825,24.49 12.01,23.675 10.275,23.675
SXA_P on Top "Polygon_1_Net_SXA_P" (solid, remove dead copper, pour order 85): 12.122,32.837 13.51,34.225 15.225,34.225 15.225,32.29 14.41,31.475 12.61,31.475 11.425,30.29 11.425,29.375 10.275,29.375 10.275,32.827
V- on Top "Polygon_20_Net_V-" (solid, remove dead copper, pour order 74): 21.524,30.368 21.524,31.368 20.724,32.169 20.724,32.331 21.968,33.576 22.432,33.576 23.832,32.176 24.331,32.176 24.908,31.6 24.3,30.992 23.868,31.424 23.068,31.424 22.7,31.792 22.376,31.469 22.376,30.469 21.9,29.992
V- on Top "Polygon_16_Net_V-" (solid, remove dead copper, pour order 76): 25.275,16.825 27.525,16.825 27.525,13.375 25.275,13.375
V- on Top "Polygon_10_Net_V-" (solid, remove dead copper, pour order 62): 14.275,39.425 16.825,39.425 16.825,37.575 14.99,37.575 14.275,38.29
V- on Top "Polygon_9_Net_V-" (solid, remove dead copper, pour order 78): 12.175,6.625 16.125,6.625 16.125,4.475 12.175,4.475
V- on Top "Polygon_8_Net_V-" (solid, remove dead copper, pour order 60): 13.875,18.425 15.71,18.425 16.435,17.7 14.61,15.875 14.49,15.875 13.875,16.49
V- on Top "Polygon_7_Net_V-" (solid, remove dead copper, pour order 58): 14.175,21.825 14.41,21.825 15.11,21.125 16.725,21.125 16.725,19.975 15.81,19.975 15.625,19.79 15.625,19.375 14.175,19.375
V- on Top "Polygon_6_Net_V-" (solid, remove dead copper, pour order 51): 14.175,27.525 16.51,27.525 16.825,27.21 16.825,25.575 15.99,25.575 15.275,26.29 15.275,26.875 14.175,26.875
V- on Top "Polygon_5_Net_V-" (solid, remove dead copper, pour order 63): 14.975,26.125 16.725,26.125 16.725,24.71 17.085,24.35 15.9,23.165 14.975,24.09
V- on Top "Polygon_4_Net_V-" (solid, remove dead copper, pour order 103): 12.075,31.025 13.025,31.025 13.025,30.125 13.79,30.125 13.99,30.325 15.31,30.325 16.125,29.51 16.125,28.475 12.075,28.475
GLC on Top "Polygon_2_Net_GLC" (solid, remove dead copper, pour order 30): 21.024,19.376 22.276,19.376 22.276,18.424 22.032,18.424 21.1,17.492 20.692,17.9 21.024,18.232
GLC on Top "Polygon_1_Net_GLC" (solid, remove dead copper, pour order 12): 23.013,22.018 23.173,21.858 23.106,21.791 22.949,21.245 22.933,21.211 22.313,20.295 22.05,20.295 21.963,20.381 21.963,20.632
GHC on Top "Polygon_1_Net_GHC" (solid, remove dead copper, pour order 9): 22.27,22.685 22.421,22.534 21.226,21.058 20.883,21.402
GLB on Top "Polygon_1_Net_GLB" (solid, remove dead copper, pour order 2): 21.208,23.728 21.361,23.574 20.374,23.028 20.056,23.424
GHB on Top "Polygon_1_Net_GHB" (solid, remove dead copper, pour order 11): 21.912,23.033 22.076,22.881 20.599,21.414 20.272,21.775
GLA on Top "Polygon_1_Net_GLA" (solid, remove dead copper, pour order 21): 21.353,26.432 21.207,26.257 19.096,27.593 19.442,27.946
GHA on Top "Polygon_1_Net_GHA" (solid, remove dead copper, pour order 17): 22.081,27.103 21.925,26.962 20.062,28.522 20.353,28.922
SHC on Top "Polygon_3_Net_SHC" (solid, remove dead copper, pour order 6): 16.156,15.935 15.301,14.867 15.491,14.707 16.32,15.485 16.575,15.485 16.575,15.949 16.33,15.935
SHC on Top "Polygon_2_Net_SHC" (solid, remove dead copper, pour order 94): 5.725,16.325 5.725,13.175 4.61,13.175 4.025,12.59 4.025,11.51 5.625,9.91 5.625,6.075 0.275,6.075 0.275,14.925 4.29,14.925 4.675,15.31 4.675,16.325
SHC on Top "Polygon_1_Net_SHC" (solid, remove dead copper, pour order 10): 22.624,22.331 22.785,22.17 21.648,20.577 21.296,20.908
SHB on Top "Polygon_3_Net_SHB" (solid, remove dead copper, pour order 4): 14.07,23.256 13.125,23.152 13.125,22.858 14.346,22.721
SHB on Top "Polygon_2_Net_SHB" (solid, remove dead copper, pour order 93): 5.925,28.225 5.925,19.375 4.675,19.375 4.675,20.29 4.09,20.875 0.275,20.875 0.275,25.125 4.19,25.125 4.675,25.61 4.675,28.225
SHB on Top "Polygon_1_Net_SHB" (solid, remove dead copper, pour order 8): 21.564,23.391 21.728,23.239 20.467,22.185 20.131,22.577
SHA on Top "Polygon_4_Net_SHA" (solid, remove dead copper, pour order 95): 5.525,39.925 5.525,36.575 4.387,36.575 3.925,35.958 3.925,35.214 5.925,33.992 5.925,29.375 4.675,29.375 4.675,30.49 4.19,30.975 0.275,30.975 0.275,39.925
SHA on Top "Polygon_3_Net_SHA" (solid, remove dead copper, pour order 5): 17.119,35.055 17.313,35.409 18.596,34.283 18.174,34.1 17.281,35.055
SHA on Top "Polygon_2_Net_SHA" (solid, remove dead copper, pour order 1): 12.383,34.477 12.171,34.699 12.814,35.38 13.034,35.183
SHA on Top "Polygon_1_Net_SHA" (solid, remove dead copper, pour order 20): 21.716,26.771 21.563,26.617 19.563,28.056 19.888,28.426
V+ on Top "Polygon_10_Net_V+" (solid, remove dead copper, pour order 80): 24.79,12.925 27.625,12.925 27.625,9.875 25.71,9.875 25.31,9.475 24.675,9.475 24.675,12.81
V+ on Top "Polygon_7_Net_V+" (solid, remove dead copper, pour order 104): 20.6,32.135 23.125,29.61 23.125,28.21 23.435,27.9 22.9,27.365 22.475,27.79 22.475,28.29 21.99,28.775 20.89,28.775 19.575,30.09 19.575,31.11
V+ on Top "Polygon_4_Net_V+" (solid, remove dead copper, pour order 82): 10.671,16.325 11.89,16.325 12.49,16.925 13.425,16.925 13.425,13.126 11.507,11.975 10.574,11.975
V+ on Top "Polygon_3_Net_V+" (solid, remove dead copper, pour order 84): 10.175,22.425 13.61,22.425 13.825,22.21 13.825,19.69 13.51,19.375 11.81,19.375 11.525,19.09 11.525,18.075 10.175,18.075
V+ on Top "Polygon_2_Net_V+" (solid, remove dead copper, pour order 83): 10.275,39.925 11.71,39.925 12.21,39.425 13.825,39.425 13.825,38.21 15.025,37.01 15.025,36.275 12.875,36.275 12.875,37.285 11.325,37.285 11.325,35.89 11.11,35.675 10.275,35.675
GND on Top "Polygon_19_Net_GND" (solid, remove dead copper, pour order 45): 11.824,43.476 13.076,43.476 13.076,41.468 12.976,41.368 12.976,40.624 12.324,40.624 12.324,41.468 11.824,41.968
GND on Top "Polygon_15_Net_GND" (solid, remove dead copper, pour order 57): 34.575,18.725 36.325,18.725 36.325,16.475 34.575,16.475
GND on Top "Polygon_14_Net_GND" (solid, remove dead copper, pour order 39): 37.575,25.525 39.125,25.525 39.125,24.075 37.575,24.075
GND on Top "Polygon_13_Net_GND" (solid, remove dead copper, pour order 31): 33.675,24.425 34.825,24.425 34.825,23.19 34.21,22.575 33.89,22.575 33.675,22.79
GND on Top "Polygon_6_Net_GND" (solid, remove dead copper, pour order 52): 25.437,42.864 26.663,42.864 26.663,39.837 25.574,39.837 25.437,39.974
+3V3 on Top "Polygon_7_Net_+3V3" (solid, remove dead copper, pour order 56): 40.39,39.125 41.525,39.125 41.525,36.89 41.11,36.475 40.7,36.475 39.975,36.475 39.975,38.71
+3V3 on Top "Polygon_5_Net_+3V3" (solid, remove dead copper, pour order 54): 33.79,43.425 34.81,43.425 34.925,43.31 34.925,40.375 33.89,40.375 33.675,40.59 33.675,42.4 33.675,43.31
+3V3 on Top "Polygon_4_Net_+3V3" (solid, remove dead copper, pour order 36): 30.475,17.125 31.825,17.125 31.825,15.575 30.59,15.575 30.475,15.69
no net on Top Overlay "Polygon_14_NoNet" (solid, pour order 28): 37.045,36.445 37.045,36.805 36.118,36.805 35.891,36.774 35.806,36.721 35.734,36.669 35.681,36.617 35.629,36.554 35.605,36.506 35.595,36.28 35.605,36.096 35.638,35.988 35.712,35.902 35.807,35.818 35.934,35.766 36.179,35.745 36.658,35.745 36.711,35.736 36.775,35.7 36.807,35.668 36.825,35.578 36.825,35.486 36.809,35.454 36.773,35.409 36.731,35.384 36.647,35.365 35.595,35.365 35.595,35.005 36.744,35.005 36.82,35.027 36.924,35.089 37.027,35.172 37.122,35.277 37.165,35.384 37.175,35.519 37.175,35.632 37.164,35.706 37.122,35.833 37.058,35.908 36.953,35.991 36.859,36.034 36.715,36.074 36.642,36.085 36.084,36.085 36.004,36.112 35.952,36.164 35.925,36.235 35.925,36.296 35.942,36.347 36.014,36.419 36.084,36.445
no net on Top Overlay "Polygon_13_NoNet" (solid, pour order 23): 34.075,36.805 35.465,36.805 35.465,36.445 34.925,36.445 34.925,35.005 34.605,35.005 34.605,36.445 34.075,36.445
no net on Top Overlay "Polygon_12_NoNet" (solid, pour order 16): 32.455,35.925 32.124,35.925 32.135,35.636 32.187,35.43 32.28,35.294 32.383,35.181 32.488,35.108 32.643,35.046 32.828,35.015 33.321,35.015 33.416,35.025 33.531,35.067 33.655,35.14 33.77,35.244 33.853,35.399 33.914,35.542 33.945,35.686 33.955,35.799 33.955,35.905 33.605,35.905 33.605,35.822 33.595,35.764 33.576,35.657 33.548,35.581 33.5,35.487 33.427,35.432 33.323,35.384 33.267,35.375 33.18,35.365 32.813,35.365 32.778,35.374 32.712,35.402 32.604,35.461 32.53,35.525 32.484,35.627 32.455,35.792
no net on Top Overlay "Polygon_11_NoNet" (solid, pour order 18): 32.124,35.875 32.135,36.142 32.145,36.235 32.177,36.35 32.25,36.475 32.353,36.588 32.456,36.671 32.601,36.754 32.766,36.785 32.918,36.805 33.181,36.805 33.314,36.795 33.439,36.764 33.644,36.661 33.728,36.588 33.801,36.504 33.883,36.319 33.914,36.227 33.935,36.134 33.945,36.022 33.957,35.855 33.608,35.855 33.575,36.143 33.529,36.247 33.48,36.324 33.434,36.371 33.378,36.408 33.284,36.446 33.22,36.455 32.824,36.455 32.759,36.436 32.653,36.388 32.598,36.342 32.55,36.285 32.522,36.248 32.484,36.181 32.465,36.097 32.455,36.02 32.455,35.875
no net on Top Overlay "Polygon_10_NoNet" (solid, pour order 14): 30.345,35.815 30.345,35.121 30.392,35.062 30.461,35.005 31.405,35.005 31.572,35.068 31.728,35.182 31.812,35.287 31.865,35.425 31.865,35.592 31.854,35.677 31.811,35.774 31.77,35.815 31.315,35.815 31.452,35.712 31.506,35.659 31.515,35.541 31.497,35.442 31.437,35.382 31.376,35.365 30.698,35.365 30.685,35.373 30.685,35.815
no net on Top Overlay "Polygon_9_NoNet" (solid, pour order 3): 31.81,36.055 30.345,36.055 30.345,35.765 31.831,35.765 31.652,35.908 31.686,35.93
no net on Top Overlay "Polygon_8_NoNet" (solid, pour order 15): 30.345,36.7 30.406,36.761 30.535,36.815 31.332,36.815 31.559,36.774 31.696,36.689 31.771,36.604 31.834,36.468 31.865,36.313 31.865,36.153 31.81,36.065 31.762,36.005 31.136,36.005 31.431,36.103 31.516,36.146 31.525,36.24 31.525,36.315 31.499,36.374 31.419,36.437 31.337,36.455 30.742,36.455 30.7,36.448 30.695,36.427 30.695,35.995 30.345,35.995
no net on Top Overlay "Polygon_7_NoNet" (solid, pour order 22): 28.715,35.015 28.715,35.365 29.443,35.365 29.553,35.429 29.625,35.519 29.625,36.795 29.975,36.795 29.975,35.497 29.954,35.401 29.891,35.286 29.766,35.14 29.62,35.057 29.484,35.015
no net on Top Overlay "Polygon_6_NoNet" (solid, pour order 7): 28.025,36.495 28.025,36.817 28.225,36.805 28.334,36.761 28.401,36.694 28.445,36.595 28.445,35.015 28.125,35.015 28.125,36.405 28.108,36.448 28.083,36.482 28.062,36.495
no net on Top Overlay "Polygon_5_NoNet" (solid, pour order 13): 27.078,35.355 26.732,35.355 26.746,35.212 26.8,35.115 26.856,35.059 26.964,35.015 27.14,35.005 27.33,35.016 27.45,35.124 27.542,35.278 27.633,35.45 27.754,35.802 27.843,36.081 27.943,36.329 28.01,36.474 28.038,36.495 28.075,36.495 28.075,36.817 27.893,36.805 27.783,36.749 27.688,36.612 27.597,36.42 27.507,36.189 27.417,35.919 27.317,35.659 27.237,35.45 27.199,35.365 27.149,35.323 27.111,35.316 27.089,35.321
no net on Top Overlay "Polygon_4_NoNet" (solid, pour order 24): 25.694,35.025 25.937,35.689 26.127,36.189 26.267,36.561 26.372,36.729 26.494,36.795 26.802,36.795 26.923,36.773 26.991,36.693 27.044,36.578 27.085,36.403 27.085,35.305 26.735,35.305 26.735,36.347 26.717,36.418 26.675,36.469 26.638,36.484 26.614,36.478 26.582,36.438 26.494,36.202 26.364,35.801 26.183,35.36 26.036,35.025
no net on Top Overlay "Polygon_3_NoNet" (solid, pour order 59): 25.657,34.062 25.317,33.723 25.161,33.098 25.408,32.948 25.65,32.817 25.938,32.721 26.318,33.18 26.562,33.086 26.68,33.05 26.831,32.506 27.17,32.495 27.512,32.505 27.662,32.528 27.762,33.14 27.926,33.186 28.151,33.242 28.544,32.799 28.772,32.908 29.014,33.049 29.249,33.242 29.058,33.823 29.198,33.963 29.309,34.092 29.911,33.931 30.062,34.158 30.143,34.33 30.247,34.595 29.048,34.595 28.772,34.268 28.467,34.011 28.109,33.782 27.644,33.615 27.139,33.565 26.665,33.595 26.24,33.733 25.942,33.862
no net on Top Overlay "Polygon_2_NoNet" (solid, pour order 67): 26.578,38.173 26.511,38.662 26.302,38.604 26.127,38.539 25.705,38.971 25.458,38.842 25.206,38.691 24.981,38.53 25.171,37.939 25.082,37.868 24.941,37.698 24.338,37.838 24.179,37.583 24.047,37.361 23.951,37.103 24.402,36.692 24.345,36.474 24.337,36.368 23.735,36.158 23.725,35.699 23.767,35.34 24.398,35.18 24.425,34.986 24.453,34.859 24.028,34.465 24.189,34.177 24.33,33.955 24.512,33.741 25.082,33.95 25.182,33.823 25.341,33.675 25.695,34.03 25.459,34.266 25.23,34.535 25.013,34.891 24.884,35.236 24.785,35.643 24.785,36.198 24.834,36.443 24.912,36.659 25.142,37.117 25.3,37.344 25.497,37.551 25.685,37.72 25.933,37.909 26.248,38.056
no net on Top Overlay "Polygon_1_NoNet" (solid, pour order 48): 30.08,37.185 30.189,37.294 30.123,37.469 30.052,37.632 29.961,37.774 29.858,37.918 29.714,38.018 29.178,37.829 29.098,37.917 29.007,38.009 28.957,38.05 29.068,38.673 28.903,38.772 28.682,38.902 28.5,38.993 28.343,39.06 27.923,38.599 27.737,38.664 27.59,38.701 27.439,39.275 27.029,39.285 26.569,39.254 26.465,38.62 26.529,38.162 26.891,38.205 27.289,38.225 27.484,38.206 27.663,38.166 27.91,38.097 28.207,37.969 28.455,37.82 28.652,37.652 28.792,37.513 28.97,37.325 29.056,37.185
V- on Route2 "Polygon_18_Net_V-" (solid, remove dead copper, pour order 72): 27.825,15.425 24.79,15.425 24.675,15.31 24.675,13.59 24.79,13.475 27.825,13.475
V- on Route2 "Polygon_3_Net_V-" (solid, remove dead copper, pour order 106): 0.473,38.073 0.473,41.869 6.061,45.627 8.527,45.627 8.527,38.073
V- on Route2 "Polygon_1_Net_V-" (solid, remove dead copper, pour order 109): 0.308,40.192 26.392,40.192 26.392,16.78 28.679,14.492 45.692,14.492 45.692,3.92 42.079,0.308 3.92,0.308 0.308,3.92
GND on Route2 "Polygon_26_Net_GND" (solid, remove dead copper, pour order 68): 7.824,43.532 8.668,44.376 10.176,44.376 10.176,42.268 9.832,41.924 8.368,41.924 7.824,42.468
GND on Route2 "Polygon_18_Net_GND" (solid, remove dead copper, pour order 47): 26.425,20.425 23.875,20.425 23.875,19.29 23.99,19.175 26.425,19.175
GND on Route2 "Polygon_17_Net_GND" (solid, remove dead copper, pour order 64): 41.025,10.425 38.975,10.425 38.975,8.175 40.81,8.175 41.025,8.39
GND on Route2 "Polygon_8_Net_GND" (solid, remove dead copper, pour order 112): 23.347,20.963 31.164,20.963 31.164,14.737 23.536,14.737 23.536,20.774
GND on Route2 "Polygon_7_Net_GND" (solid, remove dead copper, pour order 89): 25.737,25.164 28.763,25.164 28.763,19.474 28.226,18.936 25.737,18.936
GND on Route2 "Polygon_5_Net_GND" (solid, remove dead copper, pour order 101): 20.236,41.063 36.864,41.063 36.864,31.936 25.374,31.936 23.774,33.536 20.236,33.536
GND on Route2 "Polygon_3_Net_GND" (solid, remove dead copper, pour order 96): 37.837,16.663 45.564,16.663 45.564,11.936 43.026,11.936 39.2,8.11 37.837,9.474
GND on Route2 "Polygon_1_Net_GND" (solid, remove dead copper, pour order 115): 8.908,45.692 42.079,45.692 45.692,42.079 45.692,15.908 31.121,15.908 26.408,20.62 26.408,40.608 8.908,40.608

## Keep-outs
Keep-Out Layer:
  the board outline again, w0

## Silkscreen, mask and mechanical layers (free items; w line width, h text height)
Top Overlay:
  text "TEMP" at 38.107,40.12 h0.68
  text "(c) 2023" at 29.92,33.407 h1.02
  text "moteus-n1" at 29.41,31.817 h1.02
  text "r1.3" at 34.238,30.217 h1.02
  text "T" at 36.8,24.3 h0.68 r90
  text "R" at 36.8,22.3 h0.68 r90
  text "D" at 30.1,18.9 h0.68
  text "3" at 37.9,17.9 h0.68
  text "G" at 37.8,16.6 h0.68
  text "5" at 37.8,15.3 h0.68
  text "G" at 40.2,15.1 h0.51 r90
  text "Z" at 40.2,13.8 h0.51 r90
  text "Y" at 40.2,12.6 h0.51 r90
  text "B" at 40.2,11.4 h0.51 r90
  text "A" at 40.2,10.1 h0.51 r90
  text "H" at 18.5,8.7 h0.51
  text "L" at 20.5,8.7 h0.51
  text "G" at 22.5,8.7 h0.51
  text "5" at 40.3,7.6 h0.51 r90
  text "CAN" at 8.8,4.7 h0.68
  text "H" at 6.8,3.7 h0.68
  text "L" at 8.8,3.7 h0.68
  text "G" at 10.8,3.7 h0.68
Bottom Overlay:
  text "G" at 32.44,8.69 h0.51
  text "L" at 34.44,8.69 h0.51
  text "H" at 36.44,8.69 h0.51
Dimension:
  the board outline again, w0
tPlace:
  text "D" at 6.16,44.99 h0.51
  text "5" at 9.2,44.9 h0.51
  text "C" at 6.16,43.69 h0.51
  text "3" at 9.2,43.6 h0.51
  text "B" at 6.16,42.39 h0.51
  text "G" at 9.2,42.4 h0.51
  text "A" at 6.16,41.09 h0.51
  text "G" at 13,39.6 h0.68 r90
  text "D" at 14.24,39.6 h0.68 r90
  text "C" at 15.54,39.6 h0.68 r90
  text "B" at 16.8,39.6 h0.68 r90
  text "A" at 18,39.6 h0.68 r90
  text "3" at 19.3,39.6 h0.68 r90
  text "5" at 20.66,39.6 h0.68 r90
  text "G" at 27.09,39.59 h0.6 r90
  text "E" at 28.4,39.6 h0.68 r90
  text "D" at 29.64,39.6 h0.68 r90
  text "5" at 35.86,39.6 h0.68 r90
  text "C" at 30.84,39.58 h0.68 r90
  text "B" at 32.13,39.58 h0.68 r90
  text "3" at 34.63,39.58 h0.68 r90
  text "A" at 33.4,39.5 h0.68 r90
  text "A" at 2,36.5 h0.85 r270
  text "-" at 4.2,29.2 h0.85 r270
  text "B" at 4.2,23.23 h0.6 r270
  text "+" at 4.2,17.45 h0.85 r270
  text "C" at 2,10 h0.85 r270
bPlace:
  text "A" at 1.9,35.8 h1.28 r270
  text "---" at 5.1,30.1 h1.28 r90
  text "B" at 4.1,22.67 h0.85 r270
  text "+++" at 4,15.85 h1.28 r270
  text "C" at 2,9.3 h1.28 r270

## Text inside footprints (layer, text, board x,y; h text height)
L2: Measures "0.032in/0.813mm" at 44.175,23.399 h0.54 r90; Measures "0.106in/2.692mm" at 35.234,24.339 h0.54 r90; Measures "0.087in/2.21mm" at 39.705,15.906 h0.54 r90; Measures "Alt 2 Padstyle: OX90Y60D30P" at 50.424,35.108 h1.08 r90; Measures "Alt 1 Padstyle: OX60Y90D30P" at 48.9,35.108 h1.08 r90; Measures "Default Padstyle: RX46Y87D0T" at 47.376,35.515 h1.08 r90
U8: Measures "Alt 2 Padstyle: OX90Y60D30P" at 26.336,37.308 h1.08 r270; Measures "Alt 1 Padstyle: OX60Y90D30P" at 28.241,37.308 h1.08 r270; Measures "Pin One Padstyle: RX78Y22D0T" at 30.146,38.07 h1.08 r270; Measures "Default Padstyle: RX78Y22D0T" at 32.051,37.715 h1.08 r270